# EAGLE board receiver (EAGLE 9.5.0)
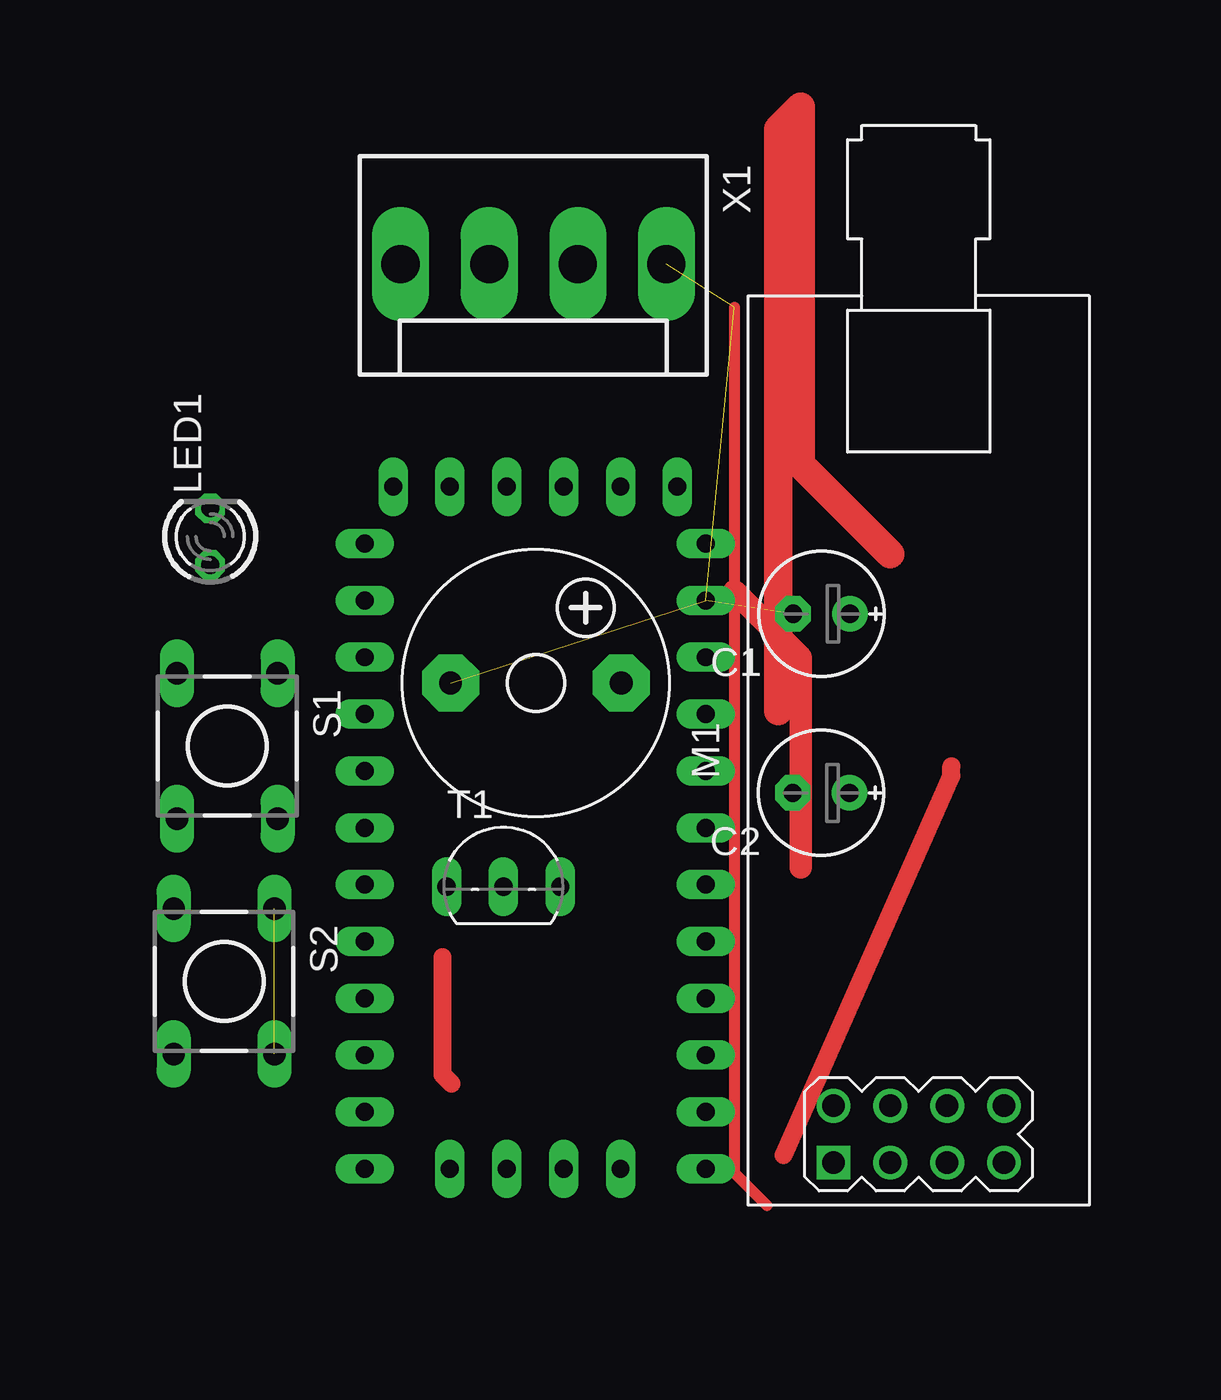
[diagram p0: board, top side]
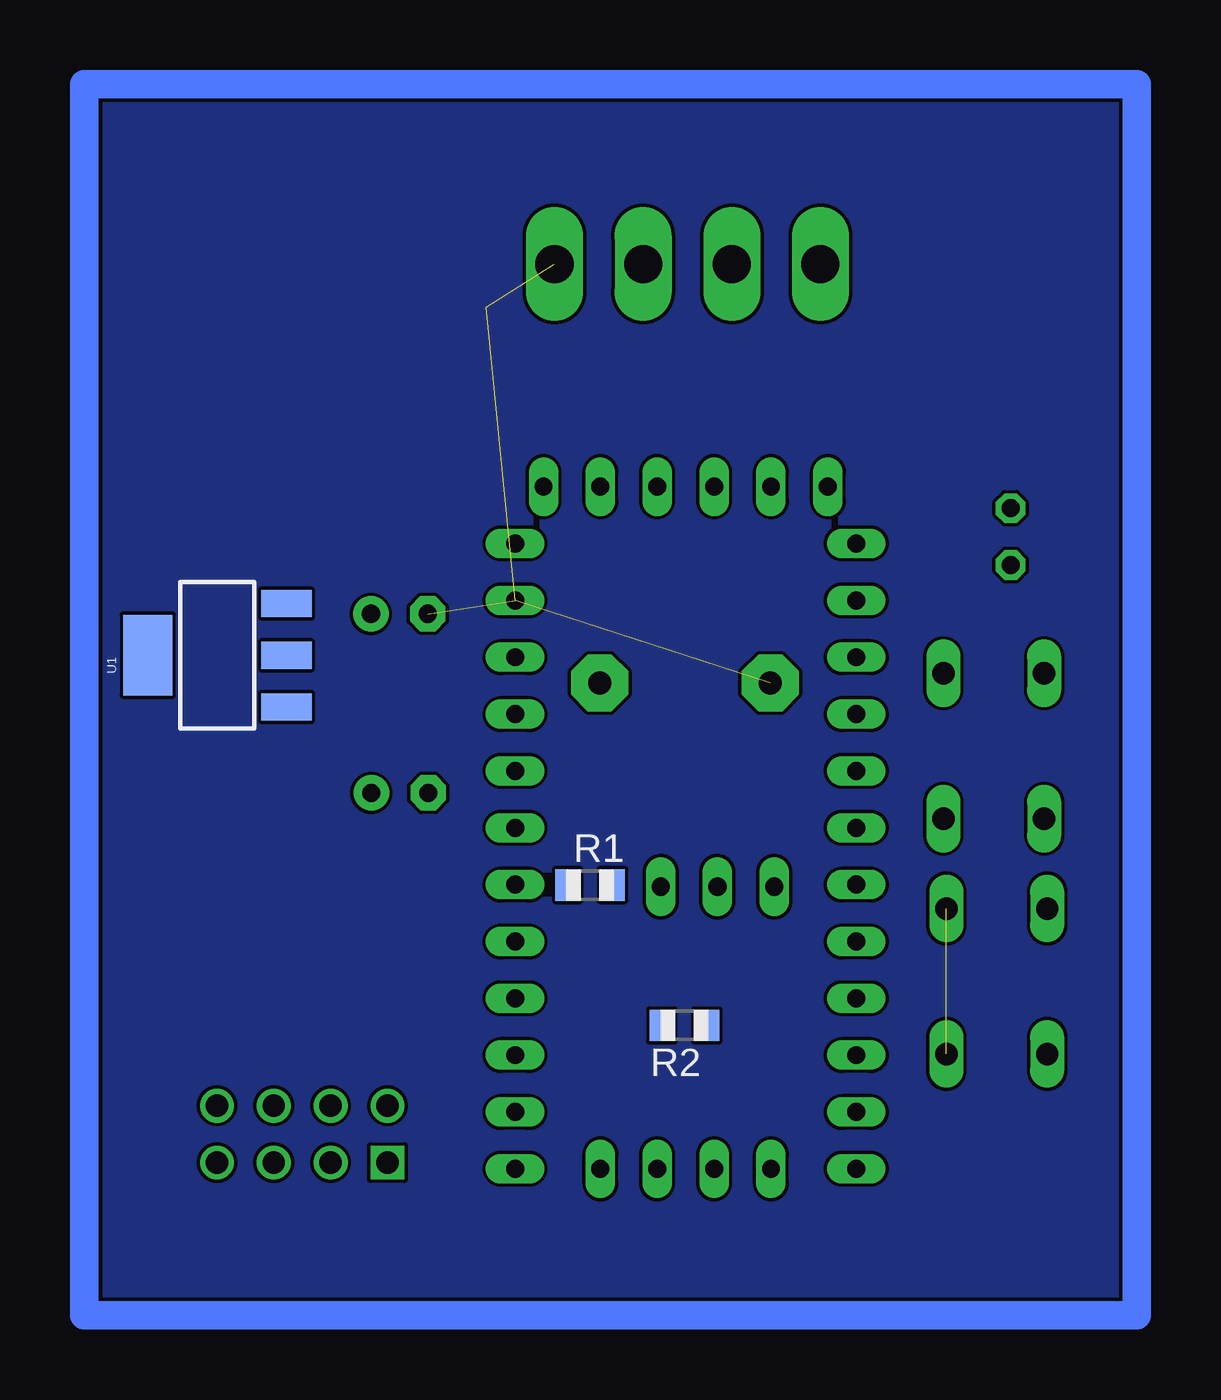
[diagram p1: board, bottom side, seen from below]

No outline drawn. Coordinates in mm, seen from the top.
Copper layers (1*16): Top 0.035mm / dielectric 1.5mm / Bottom 0.035mm
Design rules "default": minimum track width 6mil, minimum drill 0.35mm, track to track 6mil, track to pad 6mil, pad to pad 6mil, via to via 6mil, smd to smd 6mil, copper to edge 40mil, drill to drill 6mil, minimum pad ring 10mil, minimum via ring 8mil, stop-mask expansion 4mil, vias tented up to drill 0mil, thermal gap 10mil

## Footprints (pad centres in the part's own frame; a part is rotated, then mirrored left to right if it is on the bottom)
E2,5-6E = drill 0.813 pad 1.575: + -1.27,0 | drill 0.813 pad 1.575 octagon: - 1.27,0
LED3MM = drill 0.813 octagon: A -1.27,0; K 1.27,0
WIRELESS-NRF24L01-PA-EXT = drill 1 square: 1 -18.415,3.81 | drill 1: 2 -15.875,3.81; 3 -18.415,1.27; 4 -15.875,1.27; 5 -18.415,-1.27; 6 -15.875,-1.27; 7 -18.415,-3.81; 8 -15.875,-3.81
R0805 = smd 1.1 x 1.4: 1 -1,0; 2 1,0
DTS-6 = drill 1 long: 1 -3.25,2.25; 2 3.25,2.25; 3 -3.25,-2.25; 4 3.25,-2.25
F/CM12P = drill 1.016 pad 2.54 octagon: + 3.81,0; - -3.81,0
TO92-EBC-OVAL = drill 0.813 long: B 0,-1.27; C 2.54,-1.27; E -2.54,-1.27
SOT223 = smd 1.219 x 2.235: 1 -2.311,-3.099; 2 0,-3.099; 3 2.311,-3.099 | smd 3.6 x 2.2: 4 0,3.099
PRO-MINI = drill 0.8 long: A0 8.89,8.89; A1 8.89,11.43; A2 8.89,13.97; A3 8.89,16.51; A4 -2.54,-1.27; A5 0,-1.27; A6 2.54,-1.27; A7 5.08,-1.27; D2 -6.35,16.51; D3 -6.35,13.97; D4 -6.35,11.43; D5 -6.35,8.89; D6 -6.35,6.35; D7 -6.35,3.81; D8 -6.35,1.27; D9 -6.35,-1.27; D10 8.89,-1.27; D11 8.89,1.27; D12 8.89,3.81; D13 8.89,6.35; DTR 7.62,29.21; GND 8.89,24.13; GND1 -6.35,19.05; GND2 -5.08,29.21; GND3 -2.54,29.21; RAW 8.89,26.67; RST 8.89,21.59; RST1 -6.35,21.59; RX1 -6.35,24.13; RX1-1 2.54,29.21; TX0 -6.35,26.67; TX0-1 5.08,29.21; VCC 8.89,19.05; VCC1 0,29.21
KK-156-4 = drill 1.7 pad 2.184 long: 1 -5.94,0; 2 -1.98,0; 3 1.98,0; 4 5.94,0

## Placement (x,y rotation side)
C1  [E2,5-6E]  38.93,36.34 180 top
C2  [E2,5-6E]  38.91,28.34 180 top
LED1  TLLR4400  [LED3MM]  11.62,39.79 90 top
M1  WIRELESS-NRF24L01-PA-EXT  [WIRELESS-NRF24L01-PA-EXT]  43.27,30.23 90 top
R1  [R0805]  30.41,24.22 0 bottom
R2  [R0805]  26.2,17.95 180 bottom
S1  DTS-6  [DTS-6]  12.38,30.43 270 top
S2  DTS-6  [DTS-6]  12.24,19.92 270 top
SG1  F/CM12P  [F/CM12P]  26.17,33.25 0 top
T1  2N2222  [TO92-EBC-OVAL]  24.72,25.42 0 top
U1  [SOT223]  47.07,34.49 90 bottom
U$1  PRO-MINI  [PRO-MINI]  24.87,12.81 0 top
X1  [KK-156-4]  26.06,51.97 180 top

## Library data of the parts
C1 C2 = rcl; SPICEPREFIX: C
LED1 = led; MF: VISHAY SEMICONDUCTOR; OC_FARNELL: 1612437
M1 = Diy Library
R1 R2 T1 = adafruit
S1 S2 = switch-tact
SG1 = buzzer; OC_FARNELL: unknown; OC_NEWARK: unknown
U1 = SparkFun-IC-Power; PROD_ID: VREG-08170
U$1 = Arduino-clone
X1 = con-molex; MF: MOLEX; OC_FARNELL: unknown; OC_NEWARK: unknown

## Nets
BUTTON3: S2.1 S2.2
GND: C1.- SG1.- U$1.GND X1.1
RAW: U$1.RAW

## Tracks (layer width: path | path; a pad name or v marks a point on that pad's centre or on a via)
BUTTON3  (1 unrouted)
GND  (4 unrouted)
  Top 0.5: 35.04,50.04 35.04,11.35 36.49,9.9
GNDG
  pour Bottom: 6.72,5.49 52.08,5.49 52.08,59.31 6.72,59.31
N$5
  Bottom 1.27: 6,60 6,5 53,5 53,60 6,60
S$1
  Top 1.016: 35.04,37.35 38,34.39 38,25
S$16
  Top 0.813: 22.39,15.35 22,15.74 22,21
VCC
  Top 1.27: 37,32 37,58 38,59 38,43 42,39
VCC3
  Top 0.813: 44.73,29.53 44.73,29.1 37.23,12.16

## Text on the board
tSilk: Flight Comm | RX | TX | 5V | GND | LED | Buzzer | Button 1 | NRF24l01+PA | ARDUINO | Button 2 | Pro Mini | RECEIVER | Board